# EAGLE board E-Piano-SM (EAGLE 9.4.0)
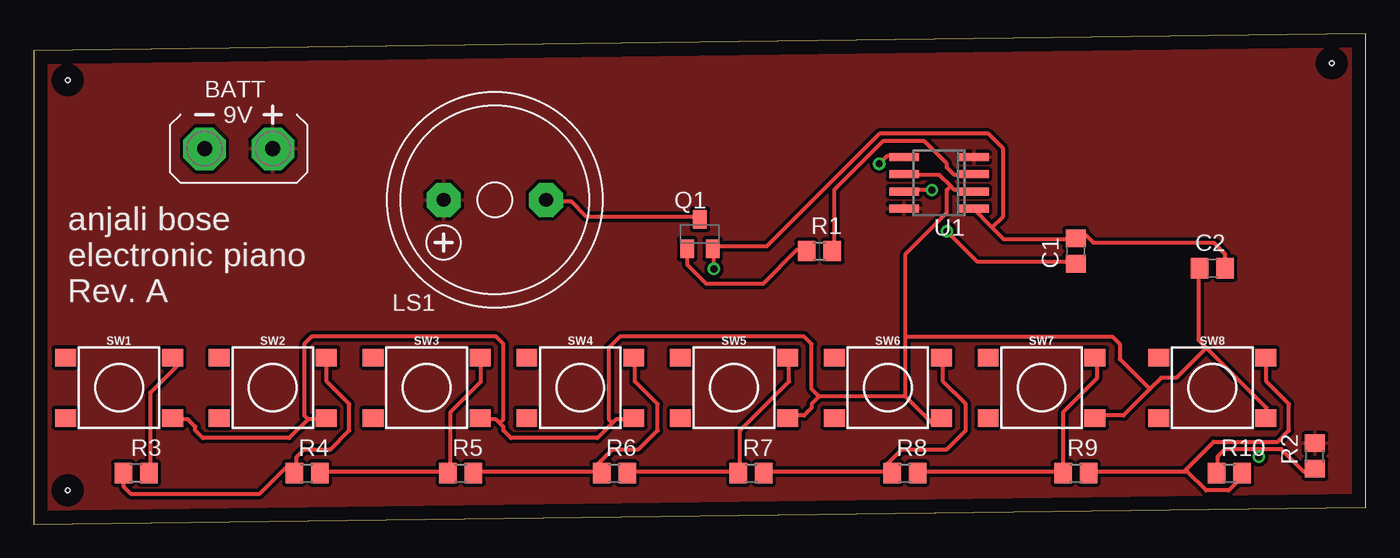
[diagram p0: board, top side]
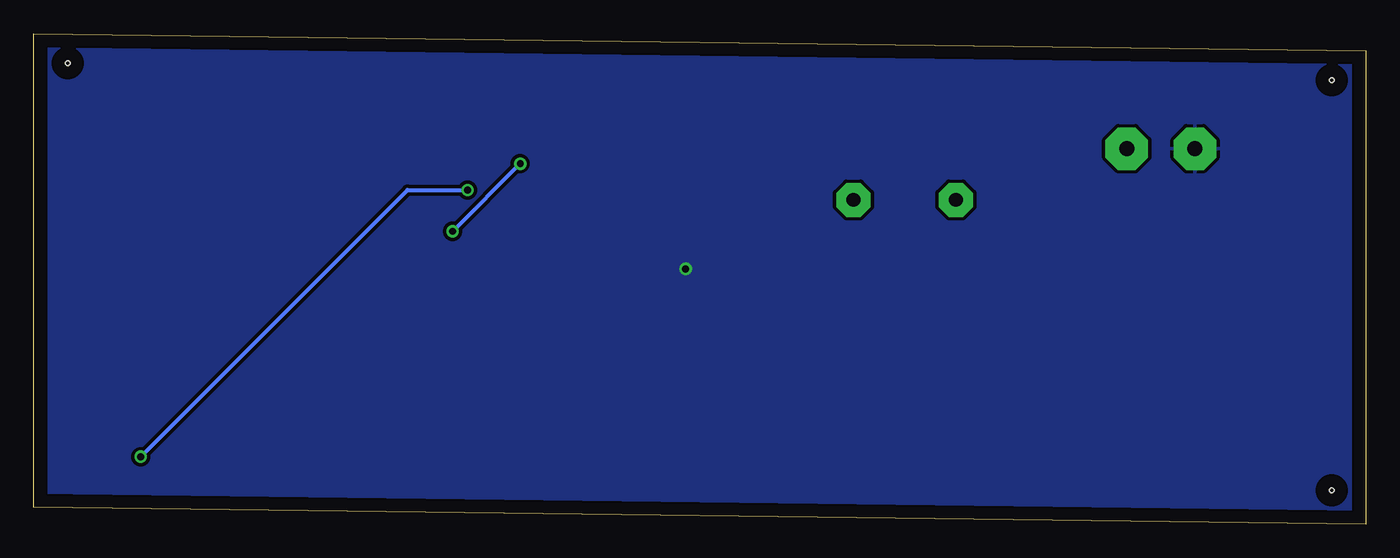
[diagram p1: board, bottom side, seen from below]

Size 99.04 x 36.5 mm. Coordinates in mm from the lower left corner, seen from the top.
Outline: 0,0 99.04,1.27 99.04,36.5 0,35.23 0,0
Copper layers (1*16): Top 0.035mm / dielectric 1.5mm / Bottom 0.035mm
Design rules "default": minimum track width 6mil, minimum drill 0.35mm, track to track 6mil, track to pad 6mil, pad to pad 6mil, via to via 6mil, smd to smd 6mil, copper to edge 40mil, drill to drill 6mil, minimum pad ring 10mil, minimum via ring 8mil, stop-mask expansion 4mil, vias tented up to drill 0mil, thermal gap 10mil
Net classes: 0 default: width 0.305 mm, drill 0.508 mm, clearance 0.254 mm
Holes 0.35 mm at 2.54,33.02 2.54,2.54 96.52,34.29

## Footprints (pad centres in the part's own frame; a part is rotated, then mirrored left to right if it is on the bottom)
AB9V = drill 1.118 pad 3.15 octagon: + 0,2.54; - 0,-2.54
C0805 = smd 1.3 x 1.5: 1 -0.95,0; 2 0.95,0
F/HMB = drill 1.016 pad 2.54 octagon: + 3.81,0; - -3.81,0
SOT23-BEC = smd 1 x 1.4: B -0.95,-1.1; C 0,1.1; E 0.95,-1.1
R0805 = smd 1.3 x 1.5: 1 -0.95,0; 2 0.95,0
TACTILE_SWITCH_SMD_6.2MM_TALL = smd 1.55 x 1.3: A1 -3.975,-2.25; A2 3.975,-2.25; B1 -3.975,2.25; B2 3.975,2.25
SO08 = smd 0.6 x 2.2: 1 -1.905,-2.6; 2 -0.635,-2.6; 3 0.635,-2.6; 4 1.905,-2.6; 5 1.905,2.6; 6 0.635,2.6; 7 -0.635,2.6; 8 -1.905,2.6

## Placement (x,y rotation side)
BATT  AB9V  [AB9V]  15.24,27.94 270 top
C1  0.1uF  [C0805]  77.47,20.32 90 top
C2  0.1uF  [C0805]  87.63,19.05 0 top
LS1  [F/HMB]  34.29,24.13 180 top
Q1  BCW66  [SOT23-BEC]  49.53,21.59 0 top
R1  1K  [R0805]  58.42,20.32 0 top
R2  1K  [R0805]  95.25,5.08 90 top
R3  1.5K  [R0805]  7.62,3.81 180 top
R4  1.3K  [R0805]  20.32,3.81 0 top
R5  620  [R0805]  31.75,3.81 0 top
R6  1.1K  [R0805]  43.18,3.81 0 top
R7  1K  [R0805]  53.34,3.81 0 top
R8  910  [R0805]  64.77,3.81 0 top
R9  390  [R0805]  77.47,3.81 0 top
R10  6.2K  [R0805]  88.9,3.81 0 top
SW1  MOMENTARY-SWITCH-SPST-SMD-6.2MM-TALL  [TACTILE_SWITCH_SMD_6.2MM_TALL]  6.35,10.16 0 top
SW2  MOMENTARY-SWITCH-SPST-SMD-6.2MM-TALL  [TACTILE_SWITCH_SMD_6.2MM_TALL]  17.78,10.16 0 top
SW3  MOMENTARY-SWITCH-SPST-SMD-6.2MM-TALL  [TACTILE_SWITCH_SMD_6.2MM_TALL]  29.21,10.16 0 top
SW4  MOMENTARY-SWITCH-SPST-SMD-6.2MM-TALL  [TACTILE_SWITCH_SMD_6.2MM_TALL]  40.64,10.16 0 top
SW5  MOMENTARY-SWITCH-SPST-SMD-6.2MM-TALL  [TACTILE_SWITCH_SMD_6.2MM_TALL]  52.07,10.16 0 top
SW6  MOMENTARY-SWITCH-SPST-SMD-6.2MM-TALL  [TACTILE_SWITCH_SMD_6.2MM_TALL]  63.5,10.16 0 top
SW7  MOMENTARY-SWITCH-SPST-SMD-6.2MM-TALL  [TACTILE_SWITCH_SMD_6.2MM_TALL]  74.93,10.16 0 top
SW8  MOMENTARY-SWITCH-SPST-SMD-6.2MM-TALL  [TACTILE_SWITCH_SMD_6.2MM_TALL]  87.63,10.16 0 top
U1  NE555D  [SO08]  67.31,25.4 90 top

## Library data of the parts
BATT = battery
C1 C2 = rcl; MOUSER#: 791-MT21B104K500CT; MPN: MT21B104K500CT; OC_NEWARK: unknown; SPICEPREFIX: C
LS1 = buzzer; MOUSER#: 665-AST-01508MR-R; OC_FARNELL: unknown; OC_NEWARK: unknown
Q1 = transistor; MF: INFINION TECHNOLOGIES; MOUSER#: 726-BCW66KHE6327HTSA; MPN: BCW66KHE6327HTSA1; OC_NEWARK: 58K2048
R1 R2 R7 = rcl; MOUSER#: 652-CR0805FX-1001ELF; MPN: CR0805FX-1001ELF; OC_NEWARK: unknown; SPICEPREFIX: R
R3 = rcl; MOUSER#: 652-CR0805FX-1501ELF; MPN: CR0805FX-1501ELF; OC_NEWARK: unknown; SPICEPREFIX: R
R4 = rcl; MOUSER#: 652-CR0805JW-132ELF; MPN: CR0805JW-132ELF; OC_NEWARK: unknown; SPICEPREFIX: R
R5 = rcl; MOUSER#: 652-CR0805JW-621ELF; MPN: CR0805JW-621ELF; OC_NEWARK: unknown; SPICEPREFIX: R
R6 = rcl; MOUSER#: 652-CR0805FX-1101ELF; MPN: CR0805FX-1101ELF; OC_NEWARK: unknown; SPICEPREFIX: R
R8 = rcl; MOUSER#: 652-CR0805FX-9100ELF; MPN: CR0805FX-9100ELF; OC_NEWARK: unknown; SPICEPREFIX: R
R9 = rcl; MOUSER#: 652-CR0805JW-391ELF; MPN: CR0805JW-391ELF; OC_NEWARK: unknown; SPICEPREFIX: R
R10 = rcl; MOUSER#: 652-CR0805FX-6201ELF; MPN: CR0805FX-6201ELF; OC_NEWARK: unknown; SPICEPREFIX: R
SW1-SW8 = SparkFun-Switches; MOUSER#: 653-B3F-1000; OC_NEWARK: unknown; PROD_ID: SWCH-11966; SF_SKU: COM-12992
U1 = linear; MOUSER#: 595-TLC555CDR; MPN: TLC555CDR; OC_NEWARK: 24M8296

## Nets
0: BATT.- C1.2 C2.2 Q1.E U1.1
N$1: R9.2 R10.2 SW8.B2
N$2: R2.1 R10.1 U1.7
N$3: R3.1 SW1.B2
N$4: R8.2 R9.1 SW7.B2
N$5: R7.2 R8.1 SW6.B2
N$6: R6.2 R7.1 SW5.B2
N$7: R5.2 R6.1 SW4.B2
N$8: R4.2 R5.1 SW3.B2
N$9: R3.2 R4.1 SW2.B2
N$11: R1.2 U1.3
N$12: C1.1 U1.5
N$13: LS1.- Q1.C
N$14: Q1.B R1.1
TR: C2.1 SW1.A2 SW2.A2 SW3.A2 SW4.A2 SW5.A2 SW6.A2 SW7.A2 SW8.A2 U1.2 U1.6
VCC: BATT.+ LS1.+ R2.2 U1.4 U1.8

## Tracks (layer width: path | path; a pad name or v marks a point on that pad's centre or on a via)
0  (via drill 0.51)
  Top 0.305: v50.57,19 50.57,20.4 Q1.E 50.57,20.68 54.48,20.68 62.87,29.06 70.97,29.06 72.08,27.94 72.08,22.91 71.25,22.07 | 71.25,22.07 69.85,23.47 U1.1 | 71.25,22.07 72.08,21.23 77.39,21.23 C1.2 77.67,21.51 78.23,21.51 78.79,20.95 87.73,20.95 88.57,20.12 88.57,19.28 C2.2
  pour Bottom: -2.54,36.83 -2.54,-2.54 100.33,-2.54 100.33,38.1 99.06,36.83
N$1
  Top 0.305: 85.5,3.91 85.78,3.91 87.17,2.52 88.85,2.52 89.97,3.63 R10.2 | 85.5,3.91 78.51,3.91 R9.2 | 85.5,3.91 87.73,6.15 92.48,6.15 93.32,6.99 93.32,8.94 91.64,10.62 91.64,12.29 SW8.B2
N$2  (via drill 0.51)
  Top 0.305: 91.08,5.59 92.76,5.59 94.44,3.91 95,3.91 R2.1 | 91.08,5.59 88.57,5.59 88.01,5.03 88.01,3.91 R10.1 | v66.78,24.87 64.82,24.87 U1.7 | 91.08,5.59 v91.08,5.03
  Bottom 0.305: v66.78,24.87 71.25,24.87 v91.08,5.03
N$3
  Top 0.305: R3.1 8.66,3.91 8.66,9.78 10.62,11.73 10.62,12.01 10.34,12.29 SW1.B2
N$4
  Top 0.305: R8.2 65.94,3.91 76.28,3.91 R9.1 76.56,3.91 76.56,8.38 79.07,10.9 79.07,12.29 SW7.B2
N$5
  Top 0.305: 63.42,3.91 63.7,3.91 R8.1 63.42,3.91 | 63.42,3.91 54.48,3.91 R7.2 | 63.42,3.91 63.42,4.47 64.54,5.59 67.89,5.59 69.29,6.99 69.29,8.94 67.61,10.62 67.61,12.29 SW6.B2
N$6
  Top 0.305: R6.2 44.15,3.91 52.25,3.91 R7.1 52.53,3.91 52.53,6.99 56.16,10.62 56.16,12.29 SW5.B2
N$7
  Top 0.305: 41.91,3.91 42.19,3.91 R6.1 41.91,3.91 | 41.91,3.91 32.97,3.91 R5.2 | 41.91,3.91 41.91,4.47 43.03,5.59 44.98,5.59 46.38,6.99 46.38,8.94 44.7,10.62 44.7,12.29 SW4.B2
N$8
  Top 0.305: R4.2 21.51,3.91 30.73,3.91 R5.1 31.01,3.91 31.01,8.38 33.25,10.62 33.25,12.29 SW3.B2
N$9
  Top 0.305: R3.2 6.71,3.63 6.71,2.79 7.26,2.23 16.76,2.23 18.72,4.19 19,4.19 19.28,3.91 R4.1 19.56,3.91 19.56,5.03 20.12,5.59 22.07,5.59 23.47,6.99 23.47,8.94 21.79,10.62 21.79,12.29 SW2.B2
N$11
  Top 0.305: R1.2 59.51,20.4 59.51,24.87 63.14,28.5 66.22,28.5 67.89,26.82 67.89,26.54 68.45,25.98 69.85,25.98 U1.3
N$12  (via drill 0.51)
  Top 0.305: v67.89,21.79 70.13,19.56 77.39,19.56 C1.1 | v62.87,26.82 63.42,27.38 64.54,27.38 U1.5
  Bottom 0.305: v62.87,26.82 v67.89,21.79
N$13
  Top 0.305: Q1.C 49.45,22.91 41.07,22.91 39.95,24.03 38.28,24.03 LS1.-
N$14
  Top 0.305: Q1.B 48.62,20.4 48.62,19.28 50.01,17.88 54.2,17.88 56.72,20.4 57.28,20.4 R1.1
TR
  Top 0.305: 20.4,7.82 19,6.43 12.57,6.43 12.01,6.99 12.01,7.26 11.46,7.82 10.34,7.82 SW1.A2 | 20.4,7.82 21.51,7.82 SW2.A2 | 34.65,7.54 34.92,7.26 34.92,6.99 35.48,6.43 41.91,6.43 43.03,7.54 | 34.65,7.54 34.37,7.82 33.25,7.82 SW3.A2 | 43.03,7.54 43.31,7.82 44.42,7.82 SW4.A2 | 20.4,7.82 20.12,8.1 20.12,13.41 20.68,13.97 34.37,13.97 34.92,13.41 34.92,7.82 34.65,7.54 | 87.17,13.13 91.64,8.66 91.64,8.1 SW8.A2 | 87.17,13.13 86.61,13.69 86.61,19 C2.1 | 82.98,10.06 83.82,10.9 84.94,10.9 87.17,13.13 | 82.98,10.06 81.03,8.1 79.07,8.1 SW7.A2 | 68.17,25.15 68.45,24.87 69.85,24.87 U1.2 | 68.17,25.15 67.33,25.98 64.82,25.98 U1.6 | 58.4,9.5 57.84,8.94 57.84,8.66 57.28,8.1 56.16,8.1 SW5.A2 | 64.82,9.5 58.4,9.5 | 64.82,9.5 66.78,7.54 67.06,7.54 67.33,7.82 SW6.A2 | 68.17,25.15 67.89,24.87 67.89,23.19 64.82,20.12 64.82,13.97 | 64.82,9.5 64.82,13.97 | 82.98,10.06 80.75,12.29 80.75,13.41 80.19,13.97 64.82,13.97 | 43.03,7.54 42.75,7.82 42.75,13.13 43.59,13.97 57.28,13.97 57.84,13.41 57.84,10.06 58.4,9.5
VCC
  pour Top: -3.81,-2.54 101.6,-2.54 101.6,38.1 -1.27,38.1

## Text on the board
tPlace: anjali bose / electronic piano / Rev. A